# Altium PCB PCB1-ESP.PcbDoc
Units mil, origin at the board's own origin, x right, y up, seen from the top; angles counter-clockwise.
Board outline 4282.5 x 3444.15 mil, 2 copper layers (Top Layer, Bottom Layer); 57 components, 55 nets, 260 pads, 27 vias.
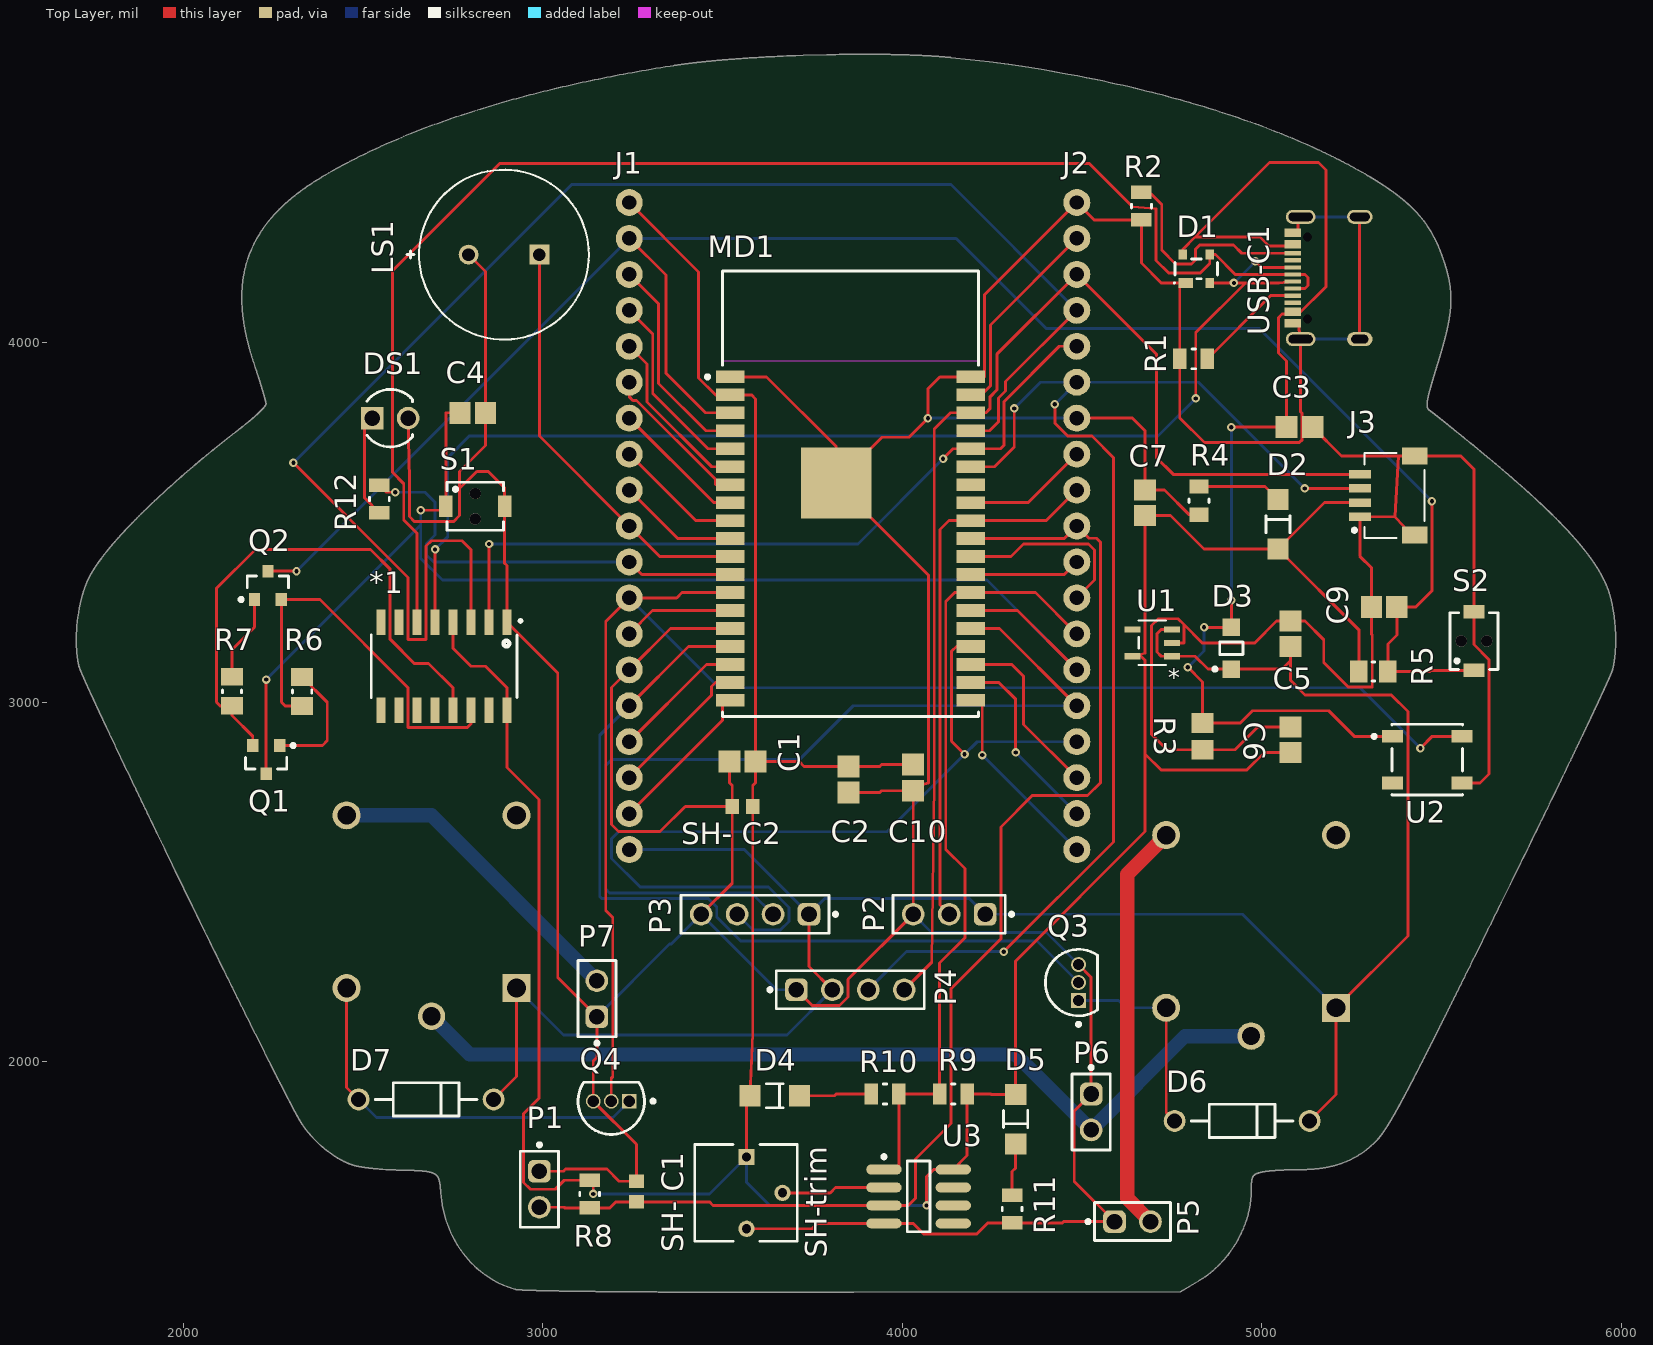
[diagram p0: Top Layer view]
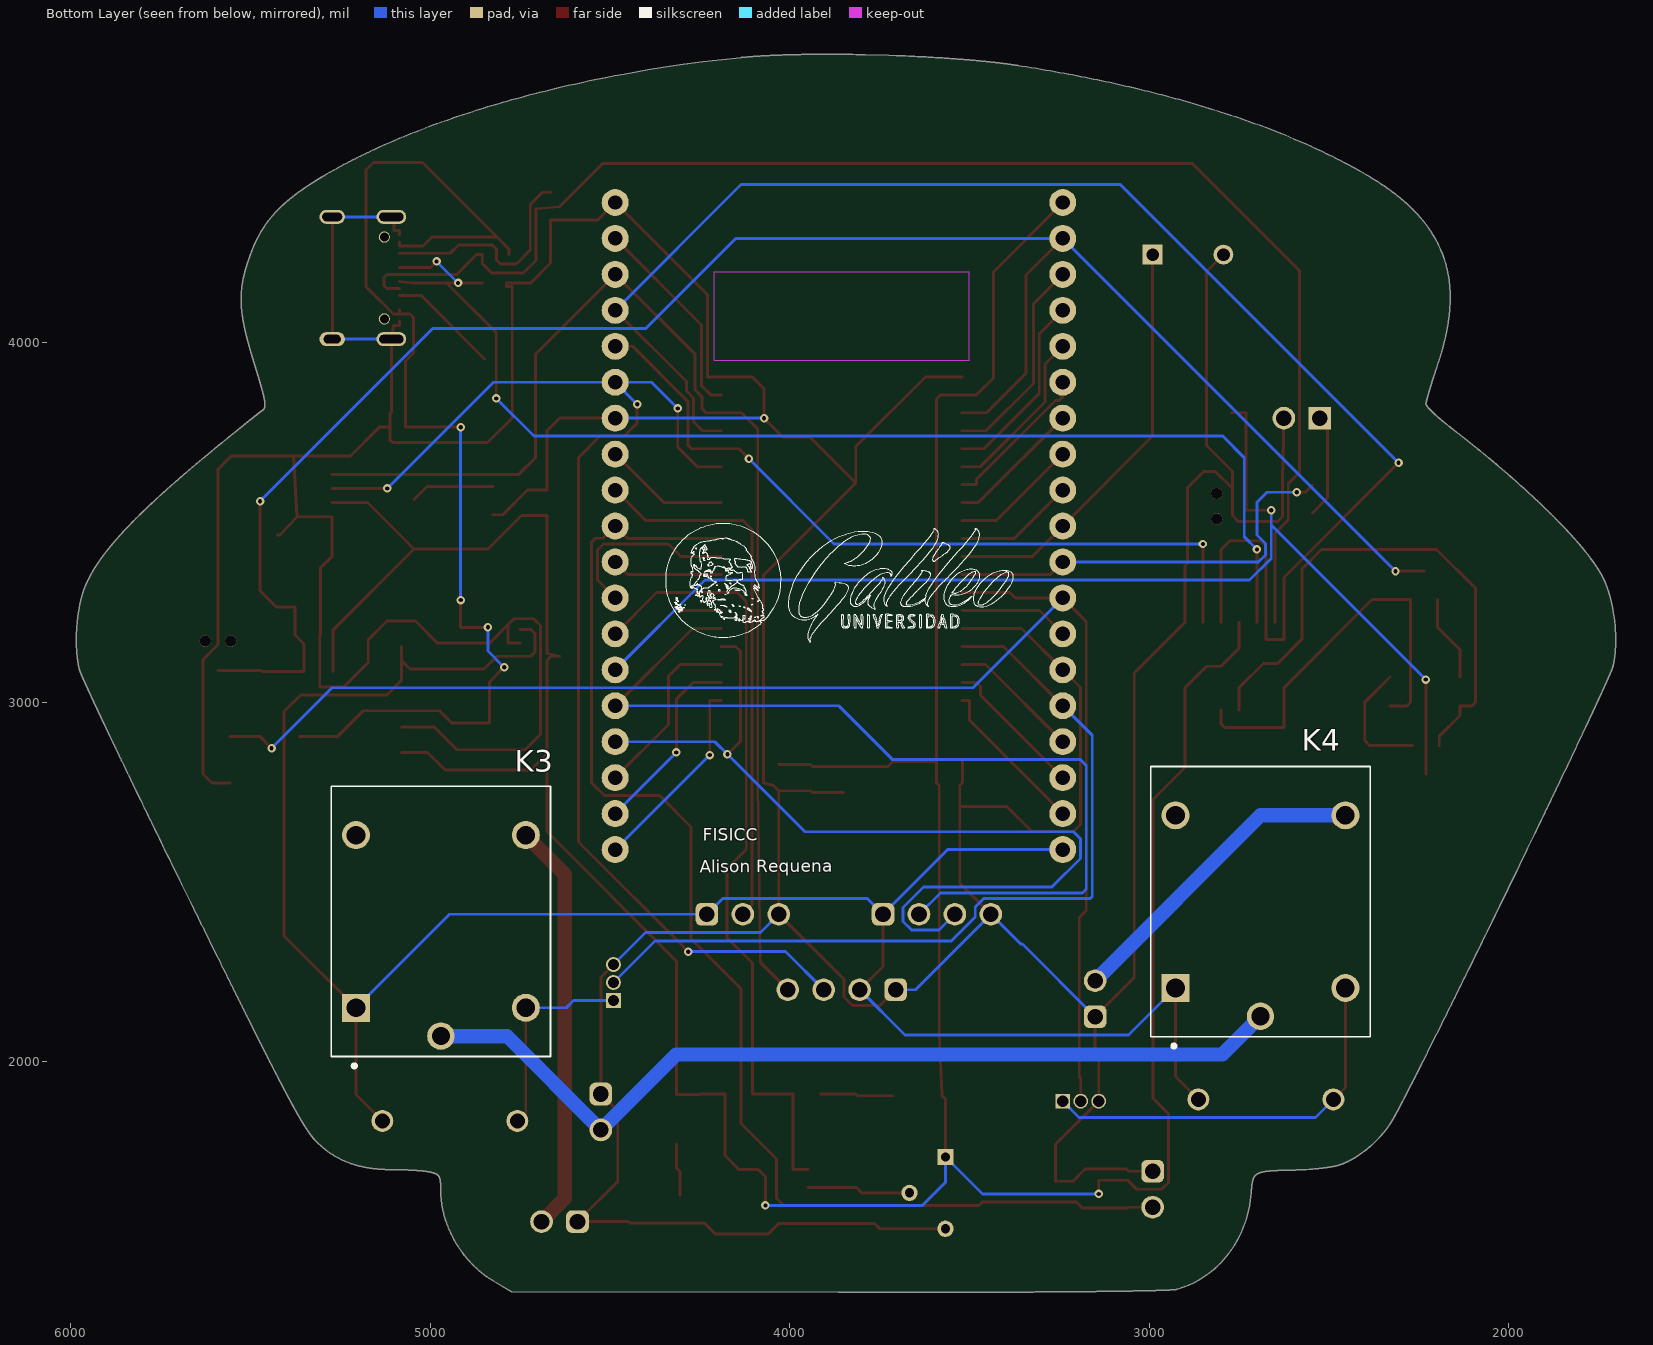
[diagram p1: Bottom Layer view, seen from below]
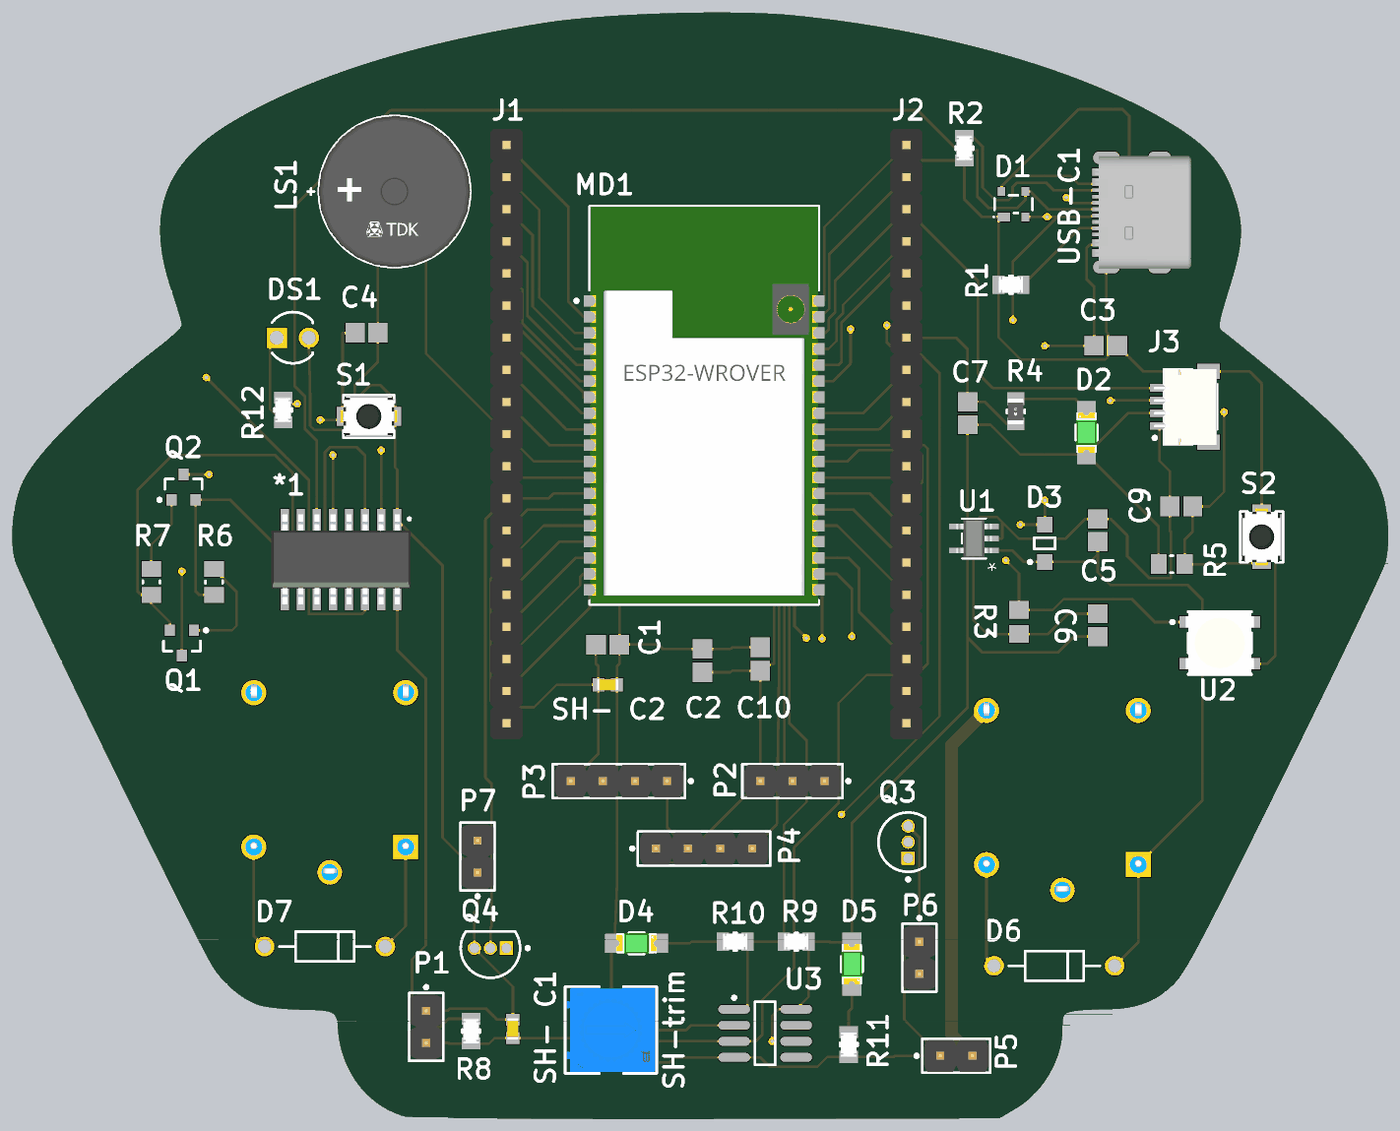
[diagram p2: 3D render of the assembled board from above, using the file's embedded part models]

## Layer stack, top to bottom
Top Solder: solder mask 0.4, Solder Resist, Dk 3.5
Top Layer: signal copper 1.4
Dielectric 1: dielectric 12.6, FR-4, Dk 4.8
Bottom Layer: signal copper 1.4
Bottom Solder: solder mask 0.4, Solder Resist, Dk 3.5

## Board outline
7619 vertices, not listed, extent 1701.76,1358.18 5984.26,4802.33

## Design rules (kind name [scope] priority, off if disabled: settings)
BoardOutlineClearance [All] p1: gap=7.87 ignorepadtopadclearanceinfootprint=FALSE
Clearance [All] p1: gap=7 ignorepadtopadclearanceinfootprint=FALSE except(6: Arc-Hole Track-Hole SMDPad-Hole THPad-Hole Via-Hole Fill-Hole Poly-Hole Region-Hole Text-Hole)
ComponentClearance [All] p1: gap=5 collisioncheckmode=3 verticalgap=5 showdistances=TRUE
DiffPairsRouting [All] p1: maxlimit=15 minlimit=8 mostfreqgap=8 toplayer_minwidth=8 toplayer_maxwidth=1000 toplayer_prefwidth=8 bottomlayer_minwidth=8 bottomlayer_maxwidth=1000 bottomlayer_prefwidth=8 maxuncoupledlength=500
Height [All] p1: minheight=0 maxheight=71497.94 prefheight=500
HoleSize [All] p1: absolutevalues=TRUE maxlimit=248.03 minlimit=11.81 maxpercent=80.000 minpercent=20.000
HoleToHoleClearance [All] p1: gap=9.84 allowstackedmicrovias=FALSE
MinimumAnnularRing [All] p1: minimumring=3
MinimumSolderMaskSliver [All] p1: minsoldermaskwidth=0
PlaneClearance [All] p1: clearance=8
PlaneConnect PlaneConnectPowerPads [InPadClass('PowerPads')] p1: planeconnectstyle=Direct reliefexpansion=20 reliefentries=4 reliefconductorwidth=10 reliefairgap=10
PlaneConnect [All] p2: pad.planeconnectstyle=Relief pad.reliefexpansion=11.81 pad.reliefentries=4 pad.reliefconductorwidth=8 pad.reliefairgap=8 via.planeconnectstyle=Direct via.reliefexpansion=11.81 via.reliefentries=4 via.reliefconductorwidth=5 via.reliefairgap=5
PolygonConnect PolygonConnectPowerPads [All vs (InPadClass('PowerPads'))] p1: connectstyle=Direct reliefconductorwidth=10 reliefentries=4 polygonreliefangle="90 Angle" airgapwidth=10
PolygonConnect [All] p2: thpad.connectstyle=Relief thpad.reliefconductorwidth=8 thpad.reliefentries=4 thpad.polygonreliefangle="90 Angle" thpad.airgapwidth=8 smdpad.connectstyle=Relief smdpad.reliefconductorwidth=8 smdpad.reliefentries=4 smdpad.polygonreliefangle="90 Angle" smdpad.airgapwidth=8 via.connectstyle=Direct via.reliefconductorwidth=5 via.reliefentries=4 via.polygonreliefangle="90 Angle" via.airgapwidth=5
RoutingVias [All] p1: holewidth=11.81 width=23.62 viastyle="Through Hole" minholewidth=11.81 minwidth=23.62 maxholewidth=23.62 maxwidth=259.84
SilkToSilkClearance [All] p1: silktosilkclearance=0
SilkToSolderMaskClearance [IsPad] p1: minsilkscreentomaskgap=5 clearancetoexposedcopper=TRUE
SolderMaskExpansion [All] p1: expansion=2.95 istentingtop=FALSE
Width [All] p1: maxlimit=1000 minlimit=8 preferedwidth=8 minimp=50.000000 maximp=50.000000 favimp=50.000000
20 further rules are at their usual default settings.

## Components (designator, comment, footprint, x,y, rotation, side; value= is the part's Value field where it differs from the comment)
*1 "CH340B" CH340B 2725,3100 r270 top
C1 "0.1 uF" CAPC2013X94X50ML20T25 3555,2835 r0 top
C2 "08055C104KAT2A" CAPC2013X94X50ML20T25 3850,2785 r90 top
C3 "08055C104KAT2A" CAPC2013X94X50ML20T25 5105,3765 r180 top
C4 "1µF" CAPC2013X145X50ML20T25 2804.57,3805 r180 top
C5 "10µF" CAPC2013X140X50ML20T25 5080,3190.43 r270 top
C6 "10µF" CAPC2013X140X50ML20T25 5080,2895.43 r270 top
C7 "1µF" CAPC2013X145X50ML20T25 4675,3554.57 r270 top
C9 "10µF" CAPC2013X145X50ML20T25 5340,3265 r0 top
C10 "0.1 uF" CAPC2013X94X50ML20T25 4030,2790 r90 top
D1 "PRTR5V0U2X,215" NXP-SOT143B-4_V 4817.6,4205.63 r90 top
D2 "HSMG-C150" FP-HSMG-C150-MFG 5045,3495 r270 top
D3 "MBR120ESFT1G" ONSC-SOD-123FL-2-498_V 4915,3150 r90 top
D4 "HSMG-C150" FP-HSMG-C150-MFG 3645,1905 r180 top
D5 "HSMG-C150" FP-HSMG-C150-MFG 4315,1840 r90 top
D6 "1N4007" ONSC-AXIAL_LEAD-2-59-10_P 4945,1835 r180 top
D7 "1N4007" ONSC-AXIAL_LEAD-2-59-10_P 2675,1895 r180 top
DS1 "HLMP-1790" LED-2P-2.54-3MM_V 2575,3790 r0 top
J1 "PH1-19-UA" PH1-19-UA 3240,4390 r270 top
J2 "PH1-19-UA" PH1-19-UA 4485,4390 r270 top
J3 "SM04B-SRSS-TB(LF)(SN)" JST_SM04B-SRSS-TB(LF)(SN) 5272.44,3574.76 r90 top
K3 "SRD-05VDC-SL-C" RELAY_SRD-05VDC-SL-C 4970,2390 r90 bottom
K4 "SRD-05VDC-SL-C" RELAY_SRD-05VDC-SL-C 2690,2445 r90 bottom
LS1 "SD1209T5-A1" FP-SD1209-MFG 2891.57,4245 r180 top
MD1 "ESP32-WROVER-I" FP-ESP32-WROVER-I-MFG 3855.35,3579.8 r0 top
P1 "61300211121" 61300211121 2990,1645 r270 top
P2 "61300311121" 61300311121 4130,2410 r180 top
P3 "61300411121" 61300411121 3590,2410 r180 top
P4 "61300411121" 61300411121 3855,2200 r0 top
P5 "61300211121" 61300211121 4640,1555 r0 top
P6 "61300211121" 61300211121 4525,1860 r270 top
P7 "61300211121" 61300211121 3150,2175 r90 top
Q1 "MMBT2222ALT1G" ONSC-SOT-23-3-318-08_V 2230,2840 r270 top
Q2 "MMBT2222ALT1G" ONSC-SOT-23-3-318-08_V 2235,3325 r90 top
Q3 "BC547B" ONSC-TO-92-3-29-11 4490,2220 r90 top
Q4 "BC547B" ONSC-TO-92-3-29-11 3190,1890 r180 top
R1 "5.1K" FP-CRCW0805-e3-MFG 4810,3955 r0 top
R2 "5.1K" FP-CRCW0805-e3-MFG 4665,4380 r90 top
R3 "100k" RESC2013X60X40ML20T25 4835,2905 r90 top
R4 "RP73D2A80R6BTG" FP-RP732A-MFG 4825,3560.63 r90 top value=80.6Ω
R5 "10 k" RESC2013X60X30ML20T20 5310,3085 r180 top
R6 "10 k" RESC2013X60X30ML20T20 2330,3029.65 r270 top
R7 "10 k" RESC2013X60X30ML20T20 2135,3030 r270 top
R8 "10k" FP-CRCW0805-e3-MFG 3130,1631.61 r90 top
R9 "10k" FP-CRCW0805-e3-MFG 4141.61,1910 r0 top
R10 "10k" FP-CRCW0805-e3-MFG 3951.61,1910 r180 top
R11 "10k" FP-CRCW0805-e3-MFG 4305,1590 r90 top
R12 "220ohm" FP-CRCW0805-e3-MFG 2545,3565 r90 top
S1 "IO0" SMT_SW_PTS_820 2811.69,3545 r0 top
S2 "PTS820J25MSMTRLFS" SMT_SW_PTS_820 5590,3170 r90 top
"SH- C1" "10nF" CAPC1608X90X35ML10T15 3260,1638.54 r270 top
"SH- C2" "GRM188R71H103KA01D" CAPC1608X90X35ML10T15 3555,2710 r0 top
SH-trim "10k" FP-3362P-1-102TLF-MFG 3565,1635 r270 top
U1 "XC6210B332MR-G" SOT-25_TOR-M 4695,3165 r180 top
U2 "1655" ADA-RGB-1655_V 5460,2840 r0 top
U3 "LM393D" D0008A_M 4045,1625 r0 top
USB-C1 "U262-161N-4BVC11" U262-161N-4BVC11 5230,4180 r90 top

## Footprints (in the part's own frame and the unit in brackets; to place one, negate y for a bottom-side part, rotate by r counter-clockwise, add the part's x,y. Pads: shape width x height; smd on the part's side, far side on the other; paste and mask are expansions set on the pad)
61300211121 [mm] "Pin Header, pitch 2.54 mm, THT, Vertical, single row, 2p"
  rrect50% 1.6x1.6 hole 1.1: 1(-1.27,0)
  round 1.6 hole 1.1: 2(1.27,0)
  silkscreen extent -3.26,-1.34 2.69,1.34, body extent -2.54,-1.27 2.54,1.27, height 8.57
61300311121 [mm] "Pin Header, pitch 2.54 mm, THT, Vertical, single row, 3p"
  rrect50% 1.6x1.6 hole 1.1: 1(-2.54,0)
  round 1.6 hole 1.1: 2(0,0) 3(2.54,0)
  silkscreen extent -4.53,-1.34 3.96,1.34, body extent -3.81,-1.27 3.81,1.27, height 8.57
61300411121 [mm] "Pin Header, pitch 2.54 mm, THT, Vertical, single row, 4p"
  rrect50% 1.6x1.6 hole 1.1: 1(-3.81,0)
  round 1.6 hole 1.1: 2(-1.27,0) 3(1.27,0) 4(3.81,0)
  silkscreen extent -5.8,-1.34 5.23,1.34, body extent -5.08,-1.27 5.08,1.27, height 8.57
ADA-RGB-1655_V [mm] "SMD, 4-Leads, Body 5x5mm"
  rect 1.5x0.9 smd: 1(-2.45,1.65) 2(-2.45,-1.65) 3(2.45,-1.65) 4(2.45,1.65)
  silkscreen extent -3.87,-2.5 2.5,2.5, body extent -2.7,-2.5 2.7,2.5, height 1.68
CAPC1608X90X35ML10T15 [mm] "Chip Capacitor, 2-Leads, Body 1.7x0.9mm, IPC Low Density"
  rect 0.95x1.05 smd: 1(-0.725,0) 2(0.725,0)
  body extent -0.85,-0.45 0.85,0.45, height 0.9
CAPC2013X94X50ML20T25 [mm] "Chip Capacitor, 2-Leads, Body 2.01x1.25mm, IPC Low Density"
  rect 1.55x1.55 smd: 1(-0.925,0) 2(0.925,0)
  body extent -1.1,-0.72 1.11,0.72, height 0.94
CAPC2013X140X50ML20T25 [mm] "Chip Capacitor, 2-Leads, Body 2.00x1.25mm, IPC Low Density"
  rect 1.5x1.55 smd: 1(-0.9,0) 2(0.9,0)
  body extent -1.1,-0.72 1.1,0.72, height 1.4
CAPC2013X145X50ML20T25 [mm] "Chip Capacitor, 2-Leads, Body 2.00x1.25mm, IPC Low Density"
  rect 1.5x1.55 smd: 1(-0.9,0) 2(0.9,0)
  body extent -1.1,-0.72 1.1,0.72, height 1.45
CH340B [mm] "- USB 2.0 Transceiver 2Mbps SOP-16_150mil USB ICs ROHS"
  rect 1.8x0.64 smd: 1(-3.105,4.445) 2(-3.105,3.175) 3(-3.105,1.905) 4(-3.105,0.635) 5(-3.105,-0.635) 6(-3.105,-1.905) 7(-3.105,-3.175) 8(-3.105,-4.445) 9(3.105,-4.445) 10(3.105,-3.175) 11(3.105,-1.905) 12(3.105,-0.635) 13(3.105,0.635) 14(3.105,1.905) 15(3.105,3.175) 16(3.105,4.445)
  silkscreen extent -3.3,-5.15 2.2,5.5, body extent -3.56,-5.51 3.56,5.51, height 2.14
D0008A_M [mm] "SOIC, 8-Leads, Body 5x4mm, Pitch 1.27mm, IPC Low Density"
  oval 2.5x0.7 smd: 1(-2.45,1.905) 2(-2.45,0.635) 3(-2.45,-0.635) 4(-2.45,-1.905) 5(2.45,-1.905) 6(2.45,-0.635) 7(2.45,0.635) 8(2.45,1.905)
  silkscreen extent -2.57,-2.5 0.8,2.93, body extent -2,-2.5 2,2.5, height 1.75
FP-3362P-1-102TLF-MFG [mm]
  rect 1.15x1.15 hole 0.65 paste-2539.97 mask+0: 1(-2.54,0.035)
  round 1.15 hole 0.65 paste-2539.97 mask+0: 2(0,2.575) 3(2.54,0.035)
  silkscreen extent -3.42,-3.62 3.42,3.62, body extent -3.52,-3.72 3.52,3.72, height 0.25
FP-CRCW0805-e3-MFG [mm]
  rect 0.95x1.45 smd paste+0 mask+0: 1(-0.975,0) 2(0.975,0)
  silkscreen extent -0.13,-0.7 0.13,0.7, body extent -1.55,-0.82 1.55,0.82, height 0.25
FP-ESP32-WROVER-I-MFG [mm]
  rect 2x0.9 smd paste+0 mask+0: 1(-8.5,8.26) 2(-8.5,6.99) 3(-8.5,5.72) 4(-8.5,4.45) 5(-8.5,3.18) 6(-8.5,1.91) 7(-8.5,0.64) 8(-8.5,-0.63) 9(-8.5,-1.9) 10(-8.5,-3.17) 11(-8.5,-4.44) 12(-8.5,-5.71) 13(-8.5,-6.98) 14(-8.5,-8.25) 15(-8.5,-9.52) 16(-8.5,-10.79) 17(-8.5,-12.06) 18(-8.5,-13.33) 19(-8.5,-14.6) 20(8.5,-14.6) 21(8.5,-13.33) 22(8.5,-12.06) 23(8.5,-10.79) 24(8.5,-9.52) 25(8.5,-8.25) 26(8.5,-6.98) 27(8.5,-5.71) 28(8.5,-4.44) 29(8.5,-3.17) 30(8.5,-1.9) 31(8.5,-0.63) 32(8.5,0.64) 33(8.5,1.91) 34(8.5,3.18) 35(8.5,4.45) 36(8.5,5.72) 37(8.5,6.99) 38(8.5,8.26)
  rect 5x5 smd paste+0 mask+0: 39(-1,0.76)
  Keep-Out Layer region: -9,9.4 9,9.4 9,15.7 -9,15.7
  Keep-Out Layer region: -9,9.4 9,9.4 9,15.7 -9,15.7
  silkscreen extent -10.22,-15.75 9.05,15.75, body extent -9.6,-15.85 9.6,15.85, height 0.25
FP-HSMG-C150-MFG [mm]
  rect 1.5x1.5 smd paste+0 mask+0: 1(-1.75,0) 2(1.75,0)
  silkscreen extent -0.6,-0.85 0.6,0.85, body extent -2.6,-0.95 2.6,0.95, height 0.25
FP-RP732A-MFG [mm]
  rect 1x1.35 smd paste+0 mask+0: 1(-1,0) 2(1,0)
  silkscreen extent -0.13,-0.7 0.13,0.7, body extent -1.6,-0.8 1.6,0.8, height 0.25
FP-SD1209-MFG [mm]
  rect 1.4x1.4 hole 0.9 paste-2539.97 mask+0: 1(-2.5,0)
  round 1.4 hole 0.9 paste-2539.97 mask+0: 2(2.5,0)
  silkscreen extent -6,-6 6.85,6, body extent -6.1,-6.1 6.1,6.1, height 0.25
JST_SM04B-SRSS-TB(LF)(SN) [mm]
  rect 0.6x1.55 smd: 1(-1.5,0) 2(-0.5,0) 3(0.5,0) 4(1.5,0)
  rect 1.2x1.8 smd: S1(-2.8,-3.875) S2(2.8,-3.875)
  silkscreen extent -3,-4.57 3,0.48, body extent -3,-4.5 3,0.45, height 2.98
LED-2P-2.54-3MM_V [mm] "LED, 2-Leads, Dia 3mm, Pitch 2.54mm"
  rect 1.6x1.6 hole 1.1: 1(-1.27,0)
  round 1.6 hole 1.1: 2(1.27,0)
  silkscreen extent -1.64,-2.03 1.57,2.03, body extent -2.06,-2.07 1.6,2.07, height 6.35
NXP-SOT143B-4_V [mm] "SOT143, 4-Leads, Body 3x1.4mm"
  rect 0.7x1 smd: 1(-1,0.75)
  rect 0.7x0.6 smd: 2(-1,-0.95) 3(1,-0.95) 4(1,0.95)
  silkscreen extent -1.05,-1.5 0.7,1.6, body extent -0.7,-1.5 0.7,1.5, height 1.1
ONSC-AXIAL_LEAD-2-59-10_P [mm] "AXIAL, 2-Leads, Diameter 2.35mm"
  round 1.55 hole 1.05: 1(-4.77,0) 2(4.77,0)
  silkscreen extent -3.59,-1.18 3.6,1.18
ONSC-SOD-123FL-2-498_V [mm] "SOD, 2-Leads, Body 2.7x1.65mm"
  rect 1.25x1.22 smd: 1(-1.475,0) 2(1.475,0)
  silkscreen extent -1.6,-0.82 0.45,1.28, body extent -1.35,-0.82 1.35,0.82, height 0.98
ONSC-SOT-23-3-318-08_V [mm] "SOT23, 3-Leads, Body 2.92x1.3mm, Pitch 0.95mm"
  rect 0.9x0.8 smd: 1(-1,0.95) 2(-1,-0.95) 3(1,0)
  silkscreen extent -1.12,-1.46 0.65,2.03, body extent -0.65,-1.46 0.65,1.46, height 1.11
ONSC-TO-92-3-29-11 [mm] "TO, 3-Leads, Body Dia 4.7mm, Pitch 1.27mm"
  rect 1.05x1.05 hole 0.8: 1(-1.27,0)
  round 1.05 hole 0.8: 2(0,0) 3(1.27,0)
  silkscreen extent -3.07,-1.34 2.35,2.35, body extent -2.35,-1.33 2.36,2.36, height 7.87
PH1-19-UA [mm] "Connector Header Through Hole 19 position 0.100\" (2.54mm)"
  round 1.905 hole 1.02: 1(0,0) 2(2.54,0) 3(5.08,0) 4(7.62,0) 5(10.16,0) 6(12.7,0) 7(15.24,0) 8(17.78,0) 9(20.32,0) 10(22.86,0) 11(25.4,0) 12(27.94,0) 13(30.48,0) 14(33.02,0) 15(35.56,0) 16(38.1,0) 17(40.64,0) 18(43.18,0) 19(45.72,0)
  body extent -1.27,-1.27 46.99,1.27, height 8.54
RELAY_SRD-05VDC-SL-C [mm]
  rect 1.98x1.98 / inner round 1.98 / far side rect 1.98x1.98 hole 1.32: A1(-6.1,6)
  round 1.98 hole 1.32: A2(-6.1,-6) NC(6.1,6) NO(6.1,-6)
  round 1.935 hole 1.29: COM(-8.1,0)
  silkscreen extent -10.3,-7.75 9.55,7.75, body extent -9.6,-7.8 9.6,7.8, height 15.8
RESC2013X60X30ML20T20 [mm] "Chip Resistor, 2-Leads, Body 2.00x1.25mm, IPC Low Density"
  rect 1.25x1.55 smd: 1(-1.025,0) 2(1.025,0)
  silkscreen extent -0.1,-0.67 0.1,0.67, body extent -1.1,-0.72 1.1,0.72, height 0.6
RESC2013X60X40ML20T25 [mm] "Chip Resistor, 2-Leads, Body 2.00x1.25mm, IPC Low Density"
  rect 1.4x1.55 smd: 1(-0.95,0) 2(0.95,0)
  body extent -1.1,-0.72 1.1,0.72, height 0.6
SMT_SW_PTS_820 [mm]
  rect 0.95x1.5 smd: 1(-2.075,0) 2(2.075,0)
  round 0.8 hole 0.8 unplated: MH1(0,0.9) MH2(0,-0.9)
  silkscreen extent -2,-1.7 2,1.7, body extent -2.25,-1.55 2.25,1.55, height 2.05
SOT-25_TOR-M [mil]
  rect 44.5x17 smd paste+0 mask+0: 1(-54.75,37.4) 2(-54.75,0) 3(-54.75,-37.4) 4(54.75,-37.4) 5(54.75,37.4)
  silkscreen extent -38,-62 38,62, body extent -55,-57 55,57, height 51
U262-161N-4BVC11 [mm] "USB-C"
  rect 0.3x1.15 smd: A1(-3.35,3.67) A4(-2.55,3.67) A5(-1.25,3.67) A6(-0.25,3.67) A7(0.25,3.67) A8(1.25,3.67) A9(2.55,3.67) A12(3.35,3.67) B1(3.05,3.67) B4(2.25,3.67) B5(1.75,3.67) B6(0.75,3.67) B7(-0.75,3.67) B8(-1.75,3.67) B9(-2.25,3.67) B12(-3.05,3.67)
  rrect100% 1x1.8 hole 1.2 slot 0.6 at 0 deg: S1(-4.32,-1.075)
  rrect100% 1x1.8 on Top Paste: S1(-4.318,-1.092) S1(4.318,-1.067)
  rrect100% 1x2.1 hole 1.7 slot 0.6 at 0 deg: S2(-4.32,3.105) S3(4.32,3.105)
  rrect100% 1x2.1 on Top Paste: S2(-4.318,3.124) S2(4.318,3.124)
  rrect100% 1x1.8 hole 1.4 slot 0.6 at 0 deg: S4(4.32,-1.075)
  round 0 / inner round 0.65 / far side round 0.787 hole 0.635: Un1(2.89,2.605) Un2(-2.89,2.605)
  body extent -4.45,-3.55 4.45,4.01, height 3.33

## Part data
*1: "- USB 2.0 Transceiver 2Mbps SOP-16_150mil USB ICs ROHS", ComponentLink1Description=Datasheet, ComponentLink1URL=https://www.mpja.com/download/35227cpdata.pdf
C1 C2 C3 C10: library part CMP-2000-05016-1, "Chip Capacitor, Ceramic, 0.1 uF, 10%, 50 V, 0805, RoHS, Tape and Reel", Capacitance=100nF, Case Size/Dimension=0805, Dielectric=X7R, Manufacturer=AVX, Rated Voltage=50V, Tolerance (%)=±10%, Datasheet URL=http://www.farnell.com/datasheets/319609.pdf, Datasheet Version=Sep-07, Manufacturer URL=http://www.avx.com/
C4 C7 C9: library part CMP-2007-01082-1, "1µF ±10% 16V Ceramic Capacitor X7R 0805 (2012 Metric)", Manufacturer=Kemet, Part Number=C0805C105K4RAC7800
C5 C6: library part CMP-2007-03242-1, "10µF ±10% 16V Ceramic Capacitor X5R 0805 (2012 Metric)", Part Number=CL21A106KOQNNNG
D1: library part CMP-2000-05285-1, "Ultra Low Capacitance Double Rail-to-Rail ESD Protection Diode, 5.5 V, 1 pF, -40 to 85 degC, 4-Pin SOT143B, RoHS, Tape and Reel", Capacitance Value=16pF, ESD Protection Voltage=8KV@ContactDisc, Leakage Current=0.1uA, Manufacturer="NXP Semiconductors", Operating Temp Range=-40Cto85C, Operating Temperature Classification=Industrial, Operating Temperature Max Deg. C=85C, Operating Temperature Min Deg. C=-40C, Package / Case=SOT, Reverse Breakdown Voltage=6V, Reverse Stand-off Voltage=5.5V, Configuration=Quad, Datasheet URL=https://datasheet.ciiva.com/4479/prtr5v0u2x-102853-4479461.pdf, Datasheet Version="Rev. 02, 01/2008", Direction Type=Uni-Directional, Leakage Current (Max)=0.1uA, Manufacturer URL=http://www.nxp.com/, Mounting=SurfaceMount, Mounting Style=SurfaceMount, Number of Elements=1, Package Type=SOT, Packaging=TapeandReel, Pin Count=3+Tab, Polarity=Uni-Directional, Product Depth (mm)=1.4mm, Product Height (mm)=1mm, Product Length (mm)=3mm, Rad Hardened=No, Suppressor Type=DiodeArrays, Working Voltage=5.5V, Working Voltage (Max)=5.5V
D2 D4 D5: library part CMP-2000-05061-2, "LED GREEN DIFFUSED 1206 SMD", Colour=Green, Forward Current=20mA, Forward Voltage=2.2V, Manufacturer=Broadcom, Max Junction Temp=+95°C, Power Dissipation=65mW, Reverse Voltage=5V, Temperature="-40°C to +85°C", Temperature Range High=+85°C, Temperature Range Low=-40°C, Automotive=No, Category=Diode, ComponentLink2Description=Datasheet, ComponentLink2URL=https://docs.broadcom.com/docs/AV02-0551EN, Device Class L1=Optoelectronics, Device Class L2=LEDs, Device Class L3=unset, Digikey Description="LED GREEN DIFFUSED 1206 SMD", Height=1.2mm, Ipc Land Pattern Name=DIOCP320160X55, Lead Free=Yes, Led Orientation="Top View", Luminous Intensity=15mcd, Manufacturer Part Number=HSMG-C150, Mouser Description="LED Uni-Color Green 570nm 2-Pin Chip LED T/R", Octopart=https://octopart.com/hsmg-c150-broadcom-71131304, Package=HSMG-C150, Peak Emmision Wavelength=570nm, RoHS=TRUE, Viewing Angle=170°, Wavelength=572nm
D3: library part CMP-1055-00434-1, "Schottky Power Rectifier, 2-Pin SOD-123, Pb-Free, Tape and Reel", Manufacturer="On Semiconductor", ComponentLink1Description="Manufacturer URL", ComponentLink1URL=http://www.onsemi.com/, ComponentLink2Description=Datasheet, ComponentLink2URL=http://www.onsemi.cn/pub_link/Collateral/MBR120ESFT1-D.PDF, ComponentLink3Description="Package Specification", ComponentLink3URL=http://www.onsemi.com/pub_link/Collateral/498-01.PDF, Configuration=Single, DatasheetVersion="Rev. 4", IFSM Max (A)=40, Mounting Technology="Surface Mount", PackageDescription="2-Pin SOD, Body 1.65 x 2.7 mm", PackageReference=SOD-123FL-2-498, PackageVersion="Rev. D, 05/2013", Packing="Tape and Reel", PartNumber=MBR120ESFT1G, RoHS=TRUE
D6 D7: library part CMP-0902-00142-1, "Standard Recovery Rectifier, 2-Pin Axial_Lead, Pb-Free, Bulk Bag", Manufacturer="On Semiconductor", ComponentLink1Description="Manufacturer URL", ComponentLink1URL=http://www.onsemi.com/, ComponentLink2Description=Datasheet, ComponentLink2URL=http://www.onsemi.com/pub_link/Collateral/1N4001-D.PDF, ComponentLink3Description="Package Specification", ComponentLink3URL=http://www.onsemi.cn/pub_link/Collateral/59-10.PDF, DatasheetVersion="Rev. 13", IFSM Max (A)=30, IO(rec) Max (A)=1, Mounting Technology="Through Hole", PackageDescription="2-Pin, Axial Lead, Diameter 2.35 mm", PackageReference=AXIAL_LEAD-2-59-10, PackageVersion="Rev. U, 02/2005", Packing="Bulk Bag", PartNumber=1N4007, RoHS=TRUE, Type="Standard Recovery", VRRM Max (V)=1000
DS1: library part CMP-2000-05186-1, "LED, Green, 2 mA, 1.9 V, -20 to 100 degC, 2-Pin THD, RoHS, Bulk", Color=Green, Dominant Wavelength/Color Temperature=569nm, Manufacturer=Avago, Package=2T-1, Category=LEDs, Datasheet URL=https://datasheet.ciiva.com/11773/0900766b800204ad-11773539.pdf, Datasheet Version=Jul-14, Intensity=2.3mcd, Lens Appearance=ColoredDiffused, Lens Shape Type=Circular, Manufacturer URL=http://www.avagotech.com/, Mounting=ThroughHole, Mounting Orientation=TopMount, Number of LEDs=1, Packaging=Bulk, Peak Wavelength=565nm, Pin Count=2, Rad Hard=No, Type=Uni-Color, Viewing Angle=50deg
J1 J2: "Connector Header Through Hole 19 position 0.100\" (2.54mm)", Supplier Part Number 1=2057-PH1-19-UA-ND, Supplier 1=Digi-Key
J3: "Connector Header Surface Mount, Right Angle 4 position 0.039 _1.00mm_", Package=None, Availability=Unavailable, MF="JST Sales", MP=SM04B-SRSS-TB_LF__SN_, Price=None, SnapEDA_Link=https://www.snapeda.com/parts/SM04B-SRSS-TB%28LF%29%28SN%29/JST%20Sales%20America%20Inc./view-part/557466/?ref=snap
K3 K4: "5V Trigger Relay Module For Arduino And Raspberry Pi 5V Trigger Relay Module For Arduino And Raspberry Pi", Package="NON STANDARD-5 Songle Relay", Availability="Not in stock", Check_prices=https://www.snapeda.com/parts/SRD-05VDC-SL-C/Songle+Relay/view-part/?ref=eda, MF="Songle Relay", MP=SRD-05VDC-SL-C, Price=None, SnapEDA_Link=https://www.snapeda.com/parts/SRD-05VDC-SL-C/Songle+Relay/view-part/?ref=snap
LS1: library part CMP-08413-000009-1, "AUDIO MAGNETIC XDCR 3-6V TH", Current Rating=60mA, Frequency=2.048kHz, Max Operating Temperature=85°C, Min Operating Temperature=-40°C, Operating Supply Voltage=5V, Package Quantity=100, Self Resonant Frequency=2.05kHz, Diameter=12mm, Height=9mm, Lead Free="Lead Free", Max Supply Current=60mA, Mount="Through Hole", Number of Pins=2, Number of Terminals/Pins=2, Operating Supply Current=60mA, Packaging=Tray, Sensing Method=Magnetic, Series=SD, Termination="PC Pins", Voltage Rating (DC)=5V, Washable=No
MD1: library part CMP-194065-000001-1, "SMD MODULE, ESP32-D0WDQ6, 32MBIT", Manufacturer=Espressif, Max Frequency=2484MHz, Max Supply Voltage=3.6V, Min Supply Voltage=2.3V, Nominal Supply Current=500mA, Temperature="-40°C to +85°C", Temperature Range High=+85°C, Temperature Range Low=-40°C, Automotive=No, Category=UNK, ComponentLink2Description=Datasheet, ComponentLink2URL=https://www.espressif.com/sites/default/files/documentation/esp32-wrover_datasheet_en.pdf, Data Rate=150Mbits/s, Device Class L1="Integrated Circuits (ICs)", Device Class L2="RF Semiconductors and Devices", Device Class L3=Transceivers, Digikey Description="SMD MODULE, ESP32-D0WDQ6, 32MBIT", Height=3.4mm, Interface=I2C,SPI,UART,I2S,Other, Lead Free=Yes, Manufacturer Part Number=ESP32-WROVER-I, Number Of Adc Channels=16, Number Of Gpio=20, Octopart=https://octopart.com/esp32-wrover-i-espressif+systems-89171349, Package=ESP32-WROVER-I, RoHS=TRUE, Sensitivity=-98dBm
P1 P5 P6 P7: library part CMP-1712-00002-6, Color=Black, Contact Resistance=20mΩ, Current Rating=3A, Max Operating Temperature=125°C, Min Operating Temperature=-40°C, Operating Supply Voltage=250V, Connector Type="Male Pin", Contact Gender=Male, Contact Material=Copper, Contact Mating Length=5.9944mm, Contact Plating=Gold, Gender=Male, Height=8.94mm, Housing Material=PBT, Lead Free="Lead Free", Lead Pitch=2.54mm, Mount="Through Hole", NexarPartId=20081794, Number of Contacts=2, Number of Pins=2, Number of Positions=2, Number of Rows=1, Orientation=Vertical, Packaging=Bulk, Pitch=2.54mm, REACH SVHC="No SVHC", RoHS=Compliant, Termination="Through Hole", Voltage Rating=250V
P2: library part CMP-1502-01062-3, Color=Black, Contact Resistance=20mΩ, Current Rating=3A, Max Operating Temperature=105°C, Min Operating Temperature=-40°C, Operating Supply Voltage=250V, Connector Type="Male Pin", Contact Material=Copper, Contact Mating Length=5.9944mm, Contact Plating=Gold, Gender=Male, Height=8.94mm, Lead Free="Lead Free", Lead Pitch=2.54mm, Mount="Through Hole", NexarPartId=32855521, Number of Contacts=3, Number of Pins=3, Number of Positions=3, Number of Rows=1, Orientation=Vertical, Packaging=Bulk, Pitch=2.54mm, REACH SVHC=Unknown, RoHS=Compliant, Termination=Solder, Voltage Rating=250V
P3 P4: library part CMP-1502-01064-3, Color=Black, Contact Resistance=20mΩ, Current Rating=3A, Max Operating Temperature=105°C, Min Operating Temperature=-40°C, Operating Supply Voltage=250V, Connector Type="Male Pin", Contact Material=Copper, Contact Mating Length=5.9944mm, Contact Plating=Gold, Gender=Male, Height=8.89mm, Lead Free="Lead Free", Lead Pitch=2.54mm, Mount="Through Hole", NexarPartId=32855522, Number of Contacts=4, Number of Pins=4, Number of Positions=4, Number of Rows=1, Orientation=Vertical, Packaging=Bulk, Pitch=2.54mm, REACH SVHC=Unknown, RoHS=Compliant, Termination=Solder, Voltage Rating=250V
Q1 Q2: library part CMP-1048-00538-1, "General Purpose Transistor, NPN Silicon, 3-Pin SOT-23, Pb-Free, Tape and Reel", Manufacturer="On Semiconductor", ComponentLink1Description="Manufacturer URL", ComponentLink1URL=http://www.onsemi.com/, ComponentLink2Description=Datasheet, ComponentLink2URL=http://www.onsemi.cn/pub_link/Collateral/MMBT2222LT1-D.PDF, ComponentLink3Description="Package Specification", ComponentLink3URL=http://www.onsemi.cn/pub_link/Collateral/318-08.PDF, DatasheetVersion="Rev. 10", fT Min (MHz)=300, IC Continuous (A)=0.6, Mounting Technology="Surface Mount", PackageDescription="3-Pin Small Outline Transistor, Body 2.92 x 1.3 mm, Pitch 0.95 mm", PackageReference=SOT-23-3-318-08, PackageVersion="Rev. AP, 11/2009", Packing="Tape and Reel", PartNumber=MMBT2222ALT1G, Polarity=NPN, RoHS=TRUE
Q3 Q4: library part CMP-1048-01467-1, "Amplifier Transistor, NPN Silicon, 3-Pin TO-92, Bulk Box", Manufacturer="On Semiconductor", ComponentLink1Description="Manufacturer URL", ComponentLink1URL=http://www.onsemi.com/, ComponentLink2Description=Datasheet, ComponentLink2URL=http://www.onsemi.com/pub_link/Collateral/BC546-D.PDF, ComponentLink3Description="Package Specification", ComponentLink3URL=http://www.onsemi.cn/pub_link/Collateral/2N6426-D.PDF, DatasheetVersion="Rev. 7", fT Min (MHz)=150, IC Continuous (A)=0.1, Mounting Technology="Through Hole", PackageDescription="3-Pin Transistor Outline, Body 4.825 x 3.685 mm, Pitch 1.27 mm", PackageReference=TO-92-3-29-11_AM_SL, PackageVersion="Rev. AM", Packing="Bulk Box", PartNumber=BC547B, Polarity=NPN, RoHS=FALSE
R1 R2 R8 R9 R10 R11 R12: library part CMP-2001-04024-2, "RES Thick Film, 5.1kΩ, 1%, 0.125W, 100ppm/°C, 0805", Case Code (Imperial)=0805, Case Code (Metric)=2012, Max Operating Temperature=155°C, Max Power Dissipation=125mW, Min Operating Temperature=-55°C, Package Quantity=10, Resistance=5.1kR, Temperature Coefficient=100ppm/°C, Tolerance=1%, Voltage Rating=150V, Case/Package=0805, Composition="Thick Film", Contact Plating=Tin, Depth=1.25mm, Features="Automotive AEC-Q200", Height=0.45mm, Lead Free="Lead Free", Length=2mm, Military Standard=Not, Mount="Surface Mount", Number of Terminations=2, Packaging="Tape and Reel", Power Rating=125mW, Radiation Hardening=No, Termination=SMD/SMT, Voltage Rating (DC)=150V, Weight=0.000194oz, Width=0.049inch
R3: library part CMP-2001-00583-1, "100 kOhms ±0.1% 0.125W, 1/8W Chip Resistor 0805 (2012 Metric) Automotive AEC-Q200 Thin Film", Manufacturer=Panasonic, Part Number=ERA6AEB104V
R4: library part CMP-03211-002377-1, "RESISTOR, 0805 80.6Ω, 0.1% 15ppm/°C", Manufacturer="TE Connectivity", Package=RP732A, Power Rating=0.125W, Resistance=80.6Ω, Temperature="-55°C to 155°C", Temperature Coefficient=15ppm/°C, Temperature Range High=155°C, Temperature Range Low=-55°C, Tolerance=0.1%, Voltage Rating=150V, Automotive=No, Category=Res, ComponentLink2Description=Datasheet, ComponentLink2URL=https://www.te.com/commerce/DocumentDelivery/DDEController?Action=srchrtrv&DocNm=1773272&DocType=DS&DocLang=English, Composition="Thin Film", Device Class L1="Passive Components", Device Class L2=Resistors, Device Class L3="Chip SMD Resistors", Height=0.65mm, Ipc Land Pattern Name=RESC200125X55, Lead Free=Yes, Manufacturer Part Number=RP73D2A80R6BTG, Octopart=https://octopart.com/rp73d2a80r6btg-te+connectivity-42011633, octopart_url=https://octopart.com/rp73d2a80r6btg-te+connectivity-42011633, Packaging="250 cut tape length", RoHS=TRUE, Series=RP73
R5 R6 R7: library part CMP-2001-04657-1, "10 kOhms ±5% 0.25W, 1/4W Chip Resistor 0805 (2012 Metric) Automotive AEC-Q200, Moisture Resistant Thick Film", Manufacturer="KOA Speer", Part Number=RK73B2ATTD103J
S1: library part PTS820J25MSMTRLFS
"SH- C1": library part CMP-2100-03642-1, "Chip Capacitor, 10 nF, +/- 10%, 50 V, -55 to 125 degC, 0603 (1608 Metric), RoHS, Tape and Reel", Case Code (Imperial)=0603, Case Code (Metric)=1608, Dielectric=X7R, Dielectric Material=Ceramic, Insulation Resistance=10GR, Manufacturer=Murata, Max Operating Temperature=125degC, Min Operating Temperature=-55degC, Package Description="2-Pin Surface Mount Device, Body 1.6 x 0.8 mm", Package Quantity=1, Tolerance=10%, Voltage=50V, Capacitance=10nF, Case/Package=0603, Datasheet URL=http://search.murata.co.jp/Ceramy/image/img/A01X/G101/ENG/GRM188R71H103KA01-01.pdf, Datasheet Version=42401.0, Depth=0.8mm, Height=0.8mm, Lead Free=LeadFree, Length=1.6mm, Manufacturer URL=http://www.murata.com/, Material=Ceramic, Mount=SurfaceMount, Number of Pins=2, Package Reference=0603, Packaging=TapeandReel, REACH SVHC=Unknown, RoHSCompliant=True, Termination=SMD/SMT, Thickness=0.035inch, Voltage Rating=50V, Voltage Rating (DC)=50V, Width=0.031inch
"SH- C2": library part CMP-2100-03642-1, "Chip Capacitor, 10 nF, +/- 10%, 50 V, -55 to 125 degC, 0603 (1608 Metric), RoHS, Tape and Reel", Capacitance=10nF, Case Code (Imperial)=0603, Case Code (Metric)=1608, Dielectric=X7R, Dielectric Material=Ceramic, Insulation Resistance=10GR, Manufacturer=Murata, Max Operating Temperature=125degC, Min Operating Temperature=-55degC, Package Description="2-Pin Surface Mount Device, Body 1.6 x 0.8 mm", Package Quantity=1, Tolerance=10%, Voltage=50V, Case/Package=0603, Datasheet URL=http://search.murata.co.jp/Ceramy/image/img/A01X/G101/ENG/GRM188R71H103KA01-01.pdf, Datasheet Version=42401.0, Depth=0.8mm, Height=0.8mm, Lead Free=LeadFree, Length=1.6mm, Manufacturer URL=http://www.murata.com/, Material=Ceramic, Mount=SurfaceMount, Number of Pins=2, Package Reference=0603, Packaging=TapeandReel, REACH SVHC=Unknown, RoHSCompliant=True, Termination=SMD/SMT, Thickness=0.035inch, Voltage Rating=50V, Voltage Rating (DC)=50V, Width=0.031inch
SH-trim: library part CMP-07234-000030-1, "10k POT", Max Operating Temperature=125°C, Max Power Dissipation=500mW, Min Operating Temperature=-55°C, Package Quantity=200, Resistance=1kR, Resistor Type=Cermet, Temperature Coefficient=100ppm/°C, Tolerance=10%, Contact Plating=Tin, Depth=7.04mm, Height=0.185inch, Length=6.71mm, Military Standard=Not, Mount="Through Hole", Number of Turns=1, Packaging=Rail/Tube, Power Rating=500mW, RoHS Compliant=Yes, Series="Trimpot® 3362 - Sealed", Technology=CERMET, Termination=Pin, Weight=0.02oz, Width=4.7mm
U1: "No Description Available", Mfr_Name="Torex Semiconductor", Copyright="Copyright (C) 2022 Ultra Librarian. All rights reserved.", Manufacturer_Part_Number=XC6210B332MR-G, RefDes=RefDes, Type=DEV
U2: library part CMP-2000-05026-1, "Intelligent Control LED Integrated Light Source, 3.5 to 5.3 V, -25 to 80 degC, 4-Pin SMD, RoHS, Tape and Reel", Color=Red,Green,Blue(RGB), Manufacturer=Adafruit-Industries-LLC, Package Description="4-Pin Surface Mount Device, Body 5 x 5 mm", Category=Optoelectronics, Configuration=Discrete, Controller Type=-, Datasheet URL=http://datasheet.octopart.com/ADA1655-Adafruit-Industries-datasheet-32028139.pdf, Datasheet Version=May-13, Family=Addressable,Specialty, Interface=-, Manufacturer URL=https://www.adafruit.com/, Mounting Type=SurfaceMount, Number of LEDs=10, Package Reference=1655, Series=Neopixel, Size / Dimension=5.00mmLx5.00mmW, Utilized LED=WS2812(5050)
U3: library part CMP-2000-04951-1, "Dual Differential Comparator, 2 to 30 V, 0 to 70 degC, 8-pin SOIC (D8), Green (RoHS & no Sb/Br)", Manufacturer=TexasInstruments, Maximum Dual Supply Voltage=±18V, Maximum Single Supply Voltage=36V, Minimum Dual Supply Voltage=±1V, Minimum Single Supply Voltage=2V, Operating Temperature=0to70degC, Package=8SOIC, Package Description="8-Pin Small Outline Integrated Circuit, Body 4.9 x 3.9 mm, Pitch 1.27 mm", Package Reference=D8, Typical Voltage Gain=106.02dB, Category=Comparator, Datasheet URL=https://datasheet.ciiva.com/15131/getdatasheetpartid-248499-15131100.pdf, Datasheet Version="Rev. W, 07/2010", Manufacturer URL=http://www.ti.com/, Mounting=SurfaceMount, Number of Channels per Chip=2, Output Type=OpenCollector, Package URL=http://www.ti.com/lit/ml/msoi002j/msoi002j.pdf, Packaging=Rail/Tube, Rad Hard=No, Rail to Rail=No, Strobe Capability=No, Typical Response Time=1.3us
USB-C1: "USB - Type C Female 16 SMT USB Connectors RoHS", ComponentLink1Description=datasheet, ComponentLink1URL=https://datasheet.lcsc.com/szlcsc/2002271811_XKB-Connectivity-U262-161N-4BVC11_C319148.pdf, ComponentLink2Description="LCSC Link", ComponentLink2URL=https://lcsc.com/product-detail/USB-Connectors_XKB-Connectivity-U262-161N-4BVC11_C319148.html

## Via types
v1: diameter 23.62, hole 11.81, Top Layer to Bottom Layer, 27 vias

## Nets (pads, with @x,y where several pads share a name; then routed paths per layer and width w, separated by ;. In a path a pad name is that pad's centre, name@x,y a point inside that pad or via, vN(x,y) a via of type N, cw(c..) or ccw(c..) an arc to the next point about the centre after c; other vN are vias at no path point)
3V3: "SH- C2.2" *1.4 *1.16 C1.2 C2.2 C6.2 C7.2 C10.2 D2.2 D4.2 D5.2 J1.1 J3.2 MD1.2 R5.2 R8.2 R9.2 SH-trim.1 U1.5 U3.8 | length 10235
  Top Layer w8: *1.4 2750,3150 2800,3100 2840,3100 2900,3040 *1.16 2900,2818 2989,2729 2989,1898 2946,1855 2946,1664 2965,1645 3034,1645 3059,1670 R8.2 3140,1670 v1(3140,1632) ; J1.1 3433,4197 3433,3902 3480,3855 MD1.2 3580,3855 3591.42,3843.58 C1.2 ; SH-trim.1 3566.38,1895.28 D4.2 3583.54,2078.65 3583.54,2710 3583.54,2768 3591.42,2775.87 C1.2 ; C10.2 3942,2826.42 3937,2821.42 C2.2 3726.58,2821.42 3713,2835 C1.2 ; v1(4067,1600) 4067,1680 4087,1700 U3.8 4180,1738.54 R9.2 4246,1910 4247.1,1908.9 D5.2 4315,2280 4675,2640 4675,2856 ; C6.2 5007,2860 4958,2811 4720,2811 4675,2856 ; R5.2 5269.65,3201.46 D2.2 ; J3.2 5173.98,3555.08 D2.2 ; 4675,2856 4675,3116.6 4664,3127.6 U1.5 4675,3136 C7.2 4746,3519.13 4839.03,3426.1 D2.2
  Bottom Layer w8: v1(3140,1632) 3463.38,1632 SH-trim.1 3566.38,1664.62 3631,1600 v1(4067,1600)
5V_ext: C5.2 D3.1 D6.1 D7.1 J1.19 K3.A1 K4.A1 P2.1 P3.1 P4.2 U1.1 U1.3 | length 5951.2
  Top Layer w8: D7.1 2926.22,1958.42 K4.A1 ; P3.1 3740,2265 P4.2 ; U1.3 4720,3202.4 4708,3190.4 4708,3139.6 4720,3127.6 U1.1 4814,3127.6 4849.67,3091.93 D3.1 5056,3091.93 5080,3115.93 ; C5.2 5080,3115.93 ; D6.1 5206.22,1908.43 K3.A1 5406,2349.62 5406,2974 5360,3020 5120,3020 5080,3060 5080,3115.93
  Bottom Layer w8: K4.A1 3057.06,2074 3679,2074 P4.2 ; J1.19 3560,2590 P3.1 3784,2454 4186,2454 P2.1 4946.06,2410 K3.A1
12v: K3.COM K4.COM P6.2 | length 2519.1
  Bottom Layer w40: K4.COM 2796.1,2020 4315,2020 P6.2 4786.1,2071.1 K3.COM
CLK: J2.19 MD1.20 | length 555.9
  Top Layer w8: MD1.20 4222,3005 v1(4222,2853)
  Bottom Layer w8: v1(4222,2853) J2.19
CMD: J1.18 MD1.19 | length 444
  Top Layer w8: J1.18 3499,2949 3499,3005 MD1.19
D+: *1.5 D1.2 USB-C1.A6 USB-C1.B6 | length 3425.7
  Top Layer w8: *1.5 v1(2700,3425) ; v1(4816,3845) 4816,4028 4954.26,4166.26 ; D1.2 v1(4922.26,4166.26) 4954.26,4166.26 ; v1(4982,4226) 4998.47,4209.53 USB-C1.B6 ; USB-C1.A6 5047.1,4166.26 4954.26,4166.26
  Bottom Layer w8: v1(2700,3425) 2735,3460 2735,3680 2795,3740 4711,3740 v1(4816,3845) ; v1(4922.26,4166.26) v1(4982,4226)
D-: *1.6 D1.3 USB-C1.A7 USB-C1.B7 | length 4017.2
  Top Layer w8: *1.6 2650,3470 2612.81,3507.19 2612.81,3607.81 2581,3639.62 2581,4200 2879,4498 4520.07,4498 4640,4378.07 4705.54,4372.65 4705.54,4228.51 4740.62,4193.44 4828.44,4193.44 4855,4220 D1.3 4870.84,4245 4926,4189.84 USB-C1.A7 5120,4189.84 5128.63,4181.21 5128.63,4159.1 5120,4150.47 USB-C1.B7
DTR: *1.13 Q1.2 R7.2 | length 1537.1
  Top Layer w8: Q1.2 2192.6,2905 2135,2962.6 R7.2 2102.35,2989.65 2092,3000 2092,3317 2200,3425 2520,3425 2575,3370 2575,3175 2642,3108 2682,3108 2750,3040 *1.13
EN: C9.2 J1.2 MD1.3 Q2.3 R5.1 S2.1 | length 5362.3
  Top Layer w8: Q2.3 v1(2314.37,3364.37) ; J1.2 3342,4188 3342,3915 3452,3805 MD1.3 ; v1(5473,3559) 5473,3310 5428,3265 C9.2 5375.43,3187.08 5350.35,3162 R5.1 5468,3085 5471.31,3088.31 S2.1
  Bottom Layer w8: v1(2314.37,3364.37) J1.2 4149.5,4290 4399.5,4040 4992,4040 v1(5473,3559)
GND: "SH- C1.1" "SH- C2.1" *1.1 C1.1 C2.1 C3.1 C4.1 C5.1 C6.1 C7.1 C9.1 C10.1 D1.1 DS1.2 J1.14 J2.1 J2.7 J3.1 J3.S1 J3.S2 LS1.2 MD1.1 MD1.15 MD1.38 MD1.39 P1.1 P2.3 P3.4 P4.1 P5.1 P6.1 P7.1 Q3.3 Q4.3 R1.1 R2.1 R3.1 R4.1 R11.1 S1.2 S2.2 SH-trim.3 U1.2 U2.3 U3.4 USB-C1.A1 USB-C1.A12 USB-C1.B1 USB-C1.B12 USB-C1.S1@5272.32,4009.92 USB-C1.S2@5107.76,4009.92 USB-C1.S3 USB-C1.S4 | length 19330.7
  Top Layer w8: DS1.2 2628.81,3619 2628.81,3516.19 2642,3503 2752,3503 2768,3519 2768,3594 ; LS1.2 2840,4198.15 C4.1 2840,3714 2768,3642 2768,3594 ; P1.1 3057,1695 3063,1701 3178,1701 3211.91,1667.09 3260,1667.09 3260,1770 Q4.3 3140,2002 3150,2012 P7.1 3041,2234 3041,3081.24 *1.1 2900,3380 2893.39,3386.61 S1.2 2893.39,3596.61 2848,3642 2816,3642 2768,3594 ; P3.4 3526.46,2496.46 3526.46,2710 ; C1.1 3518.58,2775.87 3526.46,2768 3526.46,2710 ; MD1.15 3355,3205 J1.14 3190.5,3040.5 3190.5,2660 3210.5,2640 3326,2640 3396,2710 3526.46,2710 ; MD1.1 3622,3905 3815.98,3711.02 MD1.39 ; SH-trim.3 3749,1535 3764,1550 U3.4 4030,1550 4059,1521 4207.39,1521 4238,1551.61 R11.1 4445,1551.61 4448.39,1555 P5.1 4478,1667 4478,1863 P6.1 4525,2235 Q3.3 ; P4.1 3749,2156 3825,2156 3849,2180 3849,2229 P2.3 C10.1 ; C2.1 3937,2748.58 3942,2753.58 C10.1 ; J2.7 4640,3790 4675,3755 C7.1 4729,3590 4797.74,3521.26 R4.1 ; U1.2 4783,3165 4783,3216 ; C6.1 4988.27,2930.87 4925,2867.6 R3.1 4736,2867.6 4693,2910.6 4693,3213 4712,3232 4767,3232 4783,3216 ; USB-C1.B12 USB-C1.A1 5102,4048.11 USB-C1.S2@5107,4009.92 ; USB-C1.B1 USB-C1.A12 5100,4311.89 5100,4350.08 USB-C1.S3 ; USB-C1.S2@5107.76,4009.92 USB-C1.S2@5107,4009.92 ; USB-C1.S1@5272.32,4009.92 5272,4009.92 5272,4350.08 USB-C1.S4 ; J3.S1 5417.44,3464.53 5370.2,3515.5 ; U2.3 5607.04,2775.04 5632,2800 5632,3118 5590,3160 S2.2 5590,3648 5553,3685 J3.S2 5379.62,3685 ; MD1.39 4072.51,3353.2 4072.51,2775.51 4044.42,2768 C10.1 ; MD1.39 3943.26,3737 4018,3737 v1(4071,3790) 4071,3872 4104,3905 MD1.38 4228.58,3905 4228.58,4133.58 J2.1 4533.39,4341.61 R2.1 4665,4221.26 4720,4166.26 D1.1 4788.07,4156.48 4771.61,4156.48 R1.1 4771.61,3790.39 4840,3722 5104,3722 5112,3730 C3.1@5112,3765 ; 4783,3216 4834,3165 4980,3165 5040.87,3225.87 C5.1 5120,3225.87 5172,3173.87 5172,3110 5240,3042 5307,3042 5307,3186 5304.57,3188.43 C9.1 5304.57,3374 5272.44,3406.13 J3.1 5370,3515.71 5370.2,3515.5 ; USB-C1.S2@5107,4009.92 5107,3808 5112,3803 C3.1@5112,3765 ; C3.1@5112,3765 C3.1 5221.42,3685 5379.62,3685 ; 5370.2,3515.5 5379.62,3685
  Bottom Layer w8: P7.1 3352,2327 3357,2327 P3.4 3650,2200 P4.1 ; P2.3 4081,2359 4401,2359 Q3.3 ; v1(4071,3790) J2.7 ; USB-C1.S2@5107.76,4009.92 USB-C1.S1@5272.32,4009.92 ; USB-C1.S3 USB-C1.S4
IO0: C4.2 J2.14 MD1.25 Q1.3 S1.1 | length 3701.3
  Top Layer w8: Q1.3 v1(2230,3063) ; v1(2660.19,3534) 2730,3534 S1.1 2730,3805 C4.2 ; MD1.25 4320,3255 J2.14
  Bottom Layer w8: v1(2230,3063) 2660.19,3493.19 ; v1(2660.19,3534) 2660.19,3493.19 ; J2.14 4235,3340 2720.19,3340 2660.19,3400 2660.19,3493.19
IO2: J2.15 MD1.24 P3.2 | length 2601.2
  Top Layer w8: MD1.24 4270,3205 J2.15
  Bottom Layer w8: P3.2 3580.5,2469.5 3185.5,2469.5 3174.5,2480.5 3174.5,2823.5 3191,2840 3713,2840 3863,2990 J2.15
IO4: J2.13 MD1.26 R9.1 R10.1 U3.1 | length 2208.6
  Top Layer w8: U3.1 3990,1700 R10.1 R9.1 4103.23,2274 4174,2344.77 4174,2537 4120.51,2590.49 4120.51,3280 4145.51,3305 MD1.26 4370,3305 J2.13
IO5: "SH- C1.2" J2.10 MD1.29 P1.2 R8.1 U3.3 | length 3588.4
  Top Layer w8: P1.2 3059,1595 3060.77,1593.23 R8.1 3186,1593.23 3202.77,1610 3260,1610 3463,1610 3473,1600 U3.3 4016,1600 4036,1620 4036,1729 4135,1828 4135,2203 4274,2342 4274,2653 4361,2740 4515,2740 4550.5,2775.5 4550.5,3445.5 4540,3456 4519,3456 J2.10 4450,3455 MD1.29
IO12: J1.13 MD1.14 | length 307.6
  Top Layer w8: J1.13 3305,3255 MD1.14
IO13: J1.15 MD1.16 Q3.2 | length 2361.1
  Top Layer w8: J1.15 3405,3155 MD1.16
  Bottom Layer w8: J1.15 3158,2908 3158,2459 3163.5,2453.5 3460,2453.5 3483.5,2430 3483.5,2402.5 3550.01,2335.99 4374.01,2335.99 Q3.2
IO14: J1.12 MD1.13 Q4.2 U2.4 | length 4227
  Top Layer w8: Q4.2 3190,1954 3194,1958 3194,2401 3174.5,2420.5 3174.5,3224.5 J1.12 3372,3290 3387,3305 MD1.13 ; v1(5441,2872) 5473.96,2904.96 U2.4
  Bottom Layer w8: J1.12 3490,3040 5273,3040 v1(5441,2872)
IO15: J2.16 MD1.23 P3.3 | length 2582.7
  Top Layer w8: v1(4173,2855) 4136.51,2891.49 4136.51,3141.51 4150,3155 MD1.23
  Bottom Layer w8: P3.3 3584,2366 3660,2366 3684,2390 3684,2429 3627.5,2485.5 3270.5,2485.5 3190.5,2565.5 3190.5,2620 3210,2639.5 3957.5,2639.5 v1(4173,2855) 4208,2890 J2.16
IO16: J2.12 MD1.28 | length 519.8
  Top Layer w8: MD1.28 4302,3405 4337,3440 4518,3440 4534.5,3423.5 4534.5,3339.5 J2.12
IO17: J2.11 MD1.27 | length 309.5
  Top Layer w8: MD1.27 4450,3355 J2.11
IO18: J2.9 MD1.30 P2.2 | length 1506.6
  Top Layer w8: P2.2 4104.51,2435.49 4104.51,3480 4129.51,3505 MD1.30 4400,3505 J2.9
IO19: J2.8 MD1.31 | length 350.9
  Top Layer w8: MD1.31 4350,3555 J2.8
IO21: J2.6 J3.3 MD1.33 P4.3 | length 3628.2
  Top Layer w8: MD1.33 4256,3655 4311,3710 v1(4311,3817) ; v1(4282,2306) 4587,2611 4587,3680 4527,3740 4460,3740 4424,3776 v1(4424,3829) ; v1(5119,3594.45) J3.3
  Bottom Layer w8: P4.3 4011,2306 v1(4282,2306) ; v1(4311,3817) 4384,3890 J2.6 ; v1(4424,3829) J2.6 ; v1(5119,3594.45) 4823.45,3890 J2.6
IO22: J2.3 J3.4 MD1.36 P4.4 | length 3430.1
  Top Layer w8: P4.4 4081.5,2276.5 4088.51,2774.84 4088.51,3760 4133.51,3805 MD1.36 4232.09,3805 4243.09,3816 4243.09,3848.48 4262.62,3868.01 4262.62,3967.62 J2.3 4707.18,3967.82 4707.18,3680 4753.36,3633.82 J3.4
IO23: J2.2 MD1.37 | length 574.3
  Top Layer w8: MD1.37 4219.25,3855 4244.58,3880.33 4244.58,4049.58 J2.2
IO25: J1.9 MD1.10 | length 336.6
  Top Layer w8: J1.9 3375,3455 MD1.10
IO26: J1.10 LS1.1 MD1.11 | length 1174.5
  Top Layer w8: LS1.1 2990,3740 J1.10 3325,3405 MD1.11
IO27: J1.11 MD1.12 R12.2 | length 1197.9
  Top Layer w8: R12.2 2564.39,3584 v1(2589,3584) ; J1.11 3275,3355 MD1.12
  Bottom Layer w8: v1(2589,3584) 2672,3584 2700,3556 2700,3465 2676.19,3441.19 2676.19,3409.81 2696,3390 J1.11
IO32: J1.7 MD1.8 | length 378
  Top Layer w8: J1.7 3475,3555 MD1.8
IO33: J1.8 MD1.9 | length 357.3
  Top Layer w8: J1.8 3425,3505 MD1.9
IO34: J1.5 MD1.6 | length 481.4
  Top Layer w8: J1.5 3289.5,3940.5 3289.5,3834.8 3469.3,3655 MD1.6
IO35: J1.6 MD1.7 | length 431.3
  Top Layer w8: J1.6 3240,3849.5 3250,3839.5 3260.5,3839.5 3480,3620 3480,3605 MD1.7
Load1: K3.NO P5.2 | length 1147.1
  Top Layer w40: P5.2 4625,1620 4625,2521.38 K3.NO
Load2: K4.NO P7.2 | length 886.8
  Bottom Layer w40: K4.NO 2689.84,2685.16 P7.2
NetD2_1: D2.1 R4.2 | length 235
  Top Layer w8: R4.2 5008.9,3600 D2.1
NetD4_1: D4.1 R10.2 | length 201.4
  Top Layer w8: D4.1 3811,1905 3816,1910 R10.2
NetD5_1: D5.1 R11.2 | length 146.9
  Top Layer w8: R11.2 4305,1694 4315,1704 D5.1
NetD6_2: D6.2 K3.A2 Q3.1 | length 576.7
  Top Layer w8: K3.A2 4733.78,1858.42 D6.2
  Bottom Layer w8: Q3.1 4601,2170 4621.16,2149.84 K3.A2
NetD7_2: D7.2 K4.A2 Q4.1 | length 1115.8
  Top Layer w8: K4.A2 2453.78,1928.42 D7.2
  Bottom Layer w8: D7.2 2537.2,1845 3195,1845 Q4.1
NetDS1_1: DS1.1 R12.1 | length 289.1
  Top Layer w8: DS1.1 2504,3769 2504,3567.61 R12.1
NetQ1_1: Q1.1 R6.1 | length 344.2
  Top Layer w8: Q1.1 2386.37,2879.37 2400,2893 2400,3000 R6.1
NetQ2_1: Q2.1 R7.1 | length 241.2
  Top Layer w8: R7.1 2135,3146 2197.6,3208.6 Q2.1
NetR1_2: R1.2 USB-C1.A5 | length 309.9
  Top Layer w8: R1.2 5024.17,4130.79 USB-C1.A5
NetR2_2: R2.2 USB-C1.B5 | length 626.6
  Top Layer w8: R2.2 4687.61,4418.39 4721.54,4384.46 4721.54,4257.46 4760,4219 4804,4219 4815,4230 4815,4260 4827,4272 4921,4272 4944.1,4248.9 USB-C1.B5
NetSH-trim_2: SH-trim.2 U3.2 | length 288.4
  Top Layer w8: SH-trim.2 3799,1635 3814,1650 U3.2
RTS: *1.14 Q2.2 R6.2 | length 1128.9
  Top Layer w8: R6.2 2283.11,2989.29 2272.4,3000 Q2.2 2379.37,3285.63 2625,3040 2625,2930 2790,2930 2800,2940 *1.14
RXD0: *1.2 J2.5 MD1.34 | length 2151.9
  Top Layer w8: *1.2 v1(2850,3440) ; v1(4113,3677) 4141,3705 MD1.34 4273,3705 4283,3715 4283,3836.81 4436.19,3990 J2.5
  Bottom Layer w8: v1(2850,3440) 3876,3440 v1(4113,3677)
SD0: J2.18 MD1.21 | length 532.9
  Top Layer w8: MD1.21 4268,3055 4315,3008 v1(4315,2860)
  Bottom Layer w8: v1(4315,2860) J2.18
SD1: J2.17 MD1.22 | length 504
  Top Layer w8: MD1.22 4304,3105 4337,3072 4337,2938 J2.17
SD2: J1.16 MD1.17 | length 369.8
  Top Layer w8: J1.16 3455,3105 MD1.17
SD3: J1.17 MD1.18 | length 405.1
  Top Layer w8: J1.17 3469,3019 3469,3044 3480,3055 MD1.18
TXD0: *1.3 J2.4 MD1.35 | length 4409.7
  Top Layer w8: v1(2306,3666) 2625,3347 2625,3174 2675,3174 2675,3434 2690,3449 2775,3449 2800,3424 *1.3 ; MD1.35 4242,3755 4267,3780 4267,3846 4287,3866 4287,3892 J2.4
  Bottom Layer w8: v1(2306,3666) 3080,4440 4135,4440 J2.4
VBUS: C3.2 D1.4 D3.2 R3.2 U2.1 USB-C1.A4 USB-C1.A9 USB-C1.B4 USB-C1.B9 | length 3292.5
  Top Layer w8: D1.4 4780.2,4260 4814.2,4294 ; v1(4794,3097) 4835,3056 R3.2 4940,2942.4 4973.6,2976 5186,2976 5257.04,2904.96 U2.1 ; v1(4839,3208.07) D3.2 v1(4915,3284.07) ; v1(4915,3765) C3.2 5068.58,3948.85 5046,3971.43 5046,4069.61 5056,4079.61 USB-C1.A4 ; USB-C1.B9 USB-C1.A4 ; USB-C1.A9 USB-C1.B4 5020,4268.58 4994.58,4294 4814.2,4294 ; 4814.2,4294 5021.2,4501 5157,4501 5178,4480 5178,4155.61 5102,4079.61 USB-C1.A4
  Bottom Layer w8: v1(4794,3097) 4839,3142 v1(4839,3208.07) ; v1(4915,3284.07) v1(4915,3765)
VN: J1.4 MD1.5 | length 537.4
  Top Layer w8: J1.4 3305.5,4024.5 3305.5,3858.5 3459,3705 MD1.5
VP: J1.3 MD1.4 | length 590.8
  Top Layer w8: J1.3 3321.5,4108.5 3321.5,3886.8 3453.3,3755 MD1.4
pads on no net: *1.7 *1.8 *1.9 *1.10 *1.11 *1.12 *1.15 K3.NC K4.NC MD1.32 S1.MH1 S1.MH2 S2.MH1 S2.MH2 U1.4 U2.2 U3.5 U3.6 U3.7 USB-C1.A8 USB-C1.B8 USB-C1.S1@5272,4350 USB-C1.S1@5273,4010 USB-C1.S2@5107,4010 USB-C1.S2@5107,4350 USB-C1.Un1 USB-C1.Un2

## Silkscreen, mask and mechanical layers (free items; w line width, h text height)
Bottom Overlay:
  drawing of 2942 lines, arcs and shapes, not listed
  text "FISICC" at 4241,2614 h35
  text "Alison Requena" at 4250,2525 h35 r359.66
Top 3D Body:
  drawing of 7628 lines, arcs and shapes, not listed

## Text inside footprints (layer, text, board x,y; h text height)
U1: Top Overlay "*" at 4772.25,3115.6 h50 r180; Mechanical 13 "*" at 4730,3158.6 h50 r180